# Allegro board NightIoT_uBus_Sensor_BMP_MPU_V100_PCB.brd
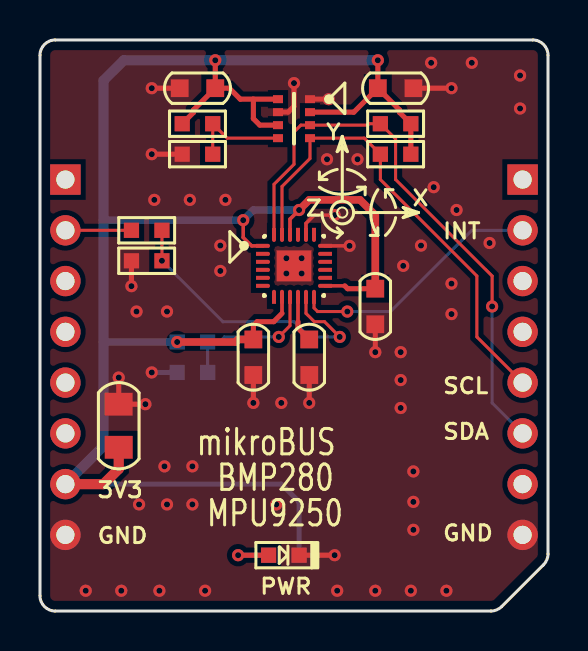
[diagram p0: board, top side]
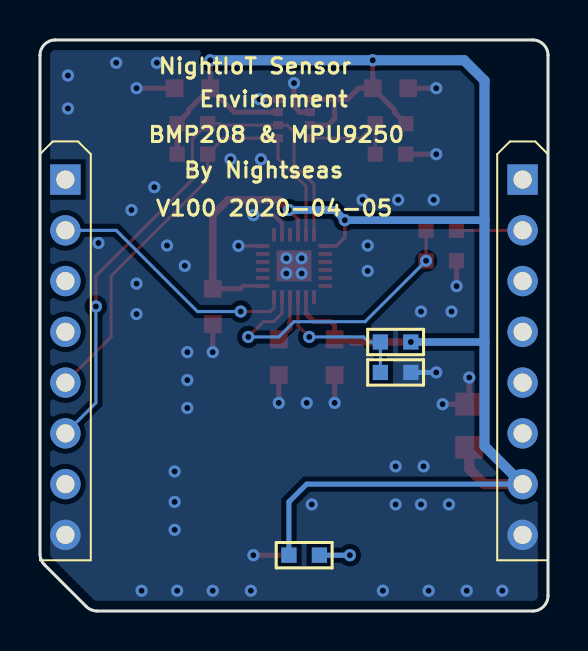
[diagram p1: board, bottom side, seen from below]

Outline 25.4 x 28.57 mm; copper layers: TOP, BOTTOM. Coordinates in mm from the lower left corner of the outline.
Outline path: 0,27.81 0,0.76 arc(0.22,0.22) 0.76,0 22.54,0 arc(22.84,0.06) 23.08,0.22 25.18,2.32 arc(25.34,2.56) 25.4,2.86 25.4,27.81 arc(25.18,28.35) 24.64,28.57 0.76,28.57 arc(0.22,28.35) 0,27.81

## Placement (name value [footprint] x y rotation side)
C1  0.1uF  [C0603]  17.78 26.16 90 top
C2  0.1uF  [C0603]  7.87 26.16 270 top
C3  10nF  [C0603]  10.67 12.7 0 top
C4  10uF  [C0805]  3.94 9.27 180 top
C5  0.1uF  [C0603]  16.76 15.24 0 top
C6  0.1uF  [C0603]  13.46 12.7 0 top
J1  uBUS_CON_A  [SIP8]  1.27 21.59 180 bottom
J2  uBUS_CON_B  [SIP8]  24.13 21.59 180 bottom
LD1  GRN  [LED0603]  11.43 2.79 0 top
R1  4.7K NC  [R0603]  7.11 24.38 0 top
R2  4.7K  [R0603]  7.11 22.86 0 top
R3  4.7K NC  [R0603]  8.38 13.46 180 bottom
R4  4.7K  [R0603]  8.38 11.94 180 bottom
R5  100K  [R0603]  6.1 17.53 180 top
R6  4.7K  [R0603]  18.54 22.86 180 top
R7  0R NC  [R0603]  6.1 19.05 180 top
R8  4.7K  [R0603]  18.54 24.38 180 top
R9  560R  [R0603]  12.95 2.79 180 bottom
U1  BMP280  [LGA8]  12.7 24.64 0 top
U2  MPU9250  [QFN24_3X3]  12.7 17.27 0 top

## Library data of the parts
C1-C6 = CAP_CE_0603
J1 J2 = HEADER 8: User Part Number: ***
LD1 = LED_0805
R1-R8 = R
R9 = R: signal model: DEFAULT_RESISTOR_4700OHM_2_1
U1 = BMP280
U2 = MPU9250

## Footprints (pads in the part's own frame, mm; a bottom-side part is the same pattern mirrored in y, then rotated)
C0603
  rect 0.889x0.889 smd: 1(0,0.889) 2(0,-0.889)
C0805
  rect 1.397x1.143 smd: 1(0,1.079) 2(0,-1.079)
LED0603
  rect 0.762x0.762 smd: 1(0,0) 2(1.524,0)
LGA8
  rect 0.5x0.4 smd: 1(0.8,0.975) 2(0.8,0.325) 3(0.8,-0.325) 4(0.8,-0.975) 5(-0.8,-0.975) 6(-0.8,-0.325) 7(-0.8,0.325) 8(-0.8,0.975)
QFN24_3X3
  custom 0.7x0.2 smd: 1(-1.55,1) 2(-1.55,0.6) 3(-1.55,0.2) 4(-1.55,-0.2) 5(-1.55,-0.6) 6(-1.55,-1) 13(1.55,-1) 14(1.55,-0.6) 15(1.55,-0.2) 16(1.55,0.2) 17(1.55,0.6) 18(1.55,1)
  custom 0.2x0.7 smd: 7(-1,-1.55) 8(-0.6,-1.55) 9(-0.2,-1.55) 10(0.2,-1.55) 11(0.6,-1.55) 12(1,-1.55) 19(1,1.55) 20(0.6,1.55) 21(0.2,1.55) 22(-0.2,1.55) 23(-0.6,1.55) 24(-1,1.55)
  rect 1.75x1.55 smd: 25(0,0)
R0603
  rect 0.762x0.762 smd: 1(0,0) 2(1.524,0)
SIP8
  rect 1.52x1.52 hole 0.91: 1(0,0)
  round 1.52 hole 0.91: 2(0,-2.54) 3(0,-5.08) 4(0,-7.62) 5(0,-10.16) 6(0,-12.7) 7(0,-15.24) 8(0,-17.78)

## Nets
GND: C1.2 C2.2 C3.2 C4.2 C5.2 C6.2 J1.8 J2.8 LD1.2(CATHODE) R2.1 R4.2 R5.2 U1.1(GND#1) U1.7(GND#7) U2.18(GND) U2.20(RESV2) U2.25(GND_EP)
VDD3V3: C1.1 C2.1 C3.1 C4.1 C5.1 J1.7 R1.1 R3.2 R6.1 R8.1 R9.1 U1.2(C\S\) U1.6(VDDIO) U1.8(VDD) U2.1(RESV0) U2.8(VDDIO) U2.13(VDD) U2.22(C\S\)
BMP_ADDR: R1.2 R2.2 U1.5(MISO)
I2C_SCL: J2.5 R6.2 U1.4(SCLK/SCL) U2.23(SCL/SCLK)
I2C_SDA: J2.6 R8.2 U1.3(MOSI/SDA) U2.24(SDA/SDI)
MPU_ADDR: R3.1 R4.1 U2.9(AD0/SDO)
MPU_FSYNC: R5.1 R7.1 U2.11(FSYNC)
MPU_INT: J2.2 U2.12(INT)
MPU_REGOUT: C6.1 U2.10(REGOUT)
MPU_RST#: J1.2 R7.2
N1536681: LD1.1(ANODE) R9.2

Pads without a net: J1 1 3 4 5 6; J2 1 3 4 7; U2 2 3 4 5 6 7 14 15 16 17 19 21

## Via types
v1: diameter 0.61, hole 0.305, TOP to BOTTOM, 71 vias

## Routing (per net, layer and track width the routed paths; a pad name or vN(x,y) marks a point on that pad's centre or on a via; arc(x,y) is an arc through that point)
GND: length 22.4
  TOP w0.178: v1(14.73,19.81) 13.72,19.81 13.3,19.4 U2.20 ; U2.18 v1(15.48,18.27)
  TOP w0.254: U1.1 v1(14.44,25.61) ; R5.2 v1(4.57,16.26) ; C6.2 v1(13.46,10.41) ; C3.2 v1(10.67,10.41) ; C5.2 v1(16.76,12.95) ; v1(5.27,10.35) C4.2 v1(3.94,11.68) ; C1.2 v1(20.57,26.16) ; LD1.2 v1(14.73,2.79) ; C2.2 v1(5.59,26.16) ; v1(12.7,26.42) 12.7,25.26 12.41,24.96 U1.7 ; R2.1 v1(5.59,22.86)
  BOTTOM w0.254: R4.2 v1(5.59,11.94)
  vias: v1(2.29,1.02) v1(4.06,1.02) v1(4.83,14.99) v1(4.95,5.33) v1(5.71,20.57) v1(5.97,1.02) v1(6.22,7.24) v1(6.35,14.99) v1(6.35,5.33) v1(7.49,20.57) v1(7.62,7.24) v1(7.62,5.33) v1(8.26,1.02) v1(9.02,18.29) v1(9.02,17.02) v1(9.27,20.57) v1(11.81,5.33) v1(12.06,10.41) v1(12.32,17.65) v1(12.32,16.89) v1(13.08,17.65) v1(13.08,16.89) v1(14.35,22.61) v1(14.86,1.02) v1(15.88,22.61) v1(16.76,1.02) v1(18.03,12.95) v1(18.03,11.56) v1(18.03,10.16) v1(18.16,17.27) v1(18.54,1.02) v1(18.67,6.99) v1(18.67,5.46) v1(18.67,4.06) v1(19.05,18.29) v1(19.56,27.43) v1(19.68,21.21) v1(20.32,1.02) v1(20.57,16.38) v1(20.57,14.86) v1(20.83,20.07) v1(21.59,27.43) v1(22.48,18.41) v1(24,26.8) v1(24,25.15)
VDD3V3: length 107.5
  TOP w0.178: v1(12.95,20.07) 12.5,19.61 U2.22 ; v1(10.16,19.56) 10.16,18.69 10.58,18.27 U2.1 ; 15.24,16.27 U2.13 ; U2.8 12.1,14.89
  TOP w0.254: 12.1,14.89 11.68,14.48 10.86,14.48 10.67,14.29 C3.1 ; 15.24,16.27 15.38,16.13 C5.1 ; C2.1 7.67,25.07 7.67,24.95 R1.1 ; C2.1 9.46,26.16 10.01,25.61 10.67,25.61 ; C2.1 v1(8.76,27.56) ; U1.8 10.67,25.61 ; 10.67,25.61 10.67,24.64 10.99,24.31 U1.6 ; U1.2 15.69,24.96 C1.1 ; C1.1 17.98,25.07 17.98,24.95 R8.1 R6.1 ; C1.1 v1(16.89,27.56)
  TOP w0.381: C5.1 16.76,19.81 16,20.57 13.46,20.57 v1(12.95,20.07) ; v1(6.86,13.46) 9.78,13.46 9.9,13.59 C3.1
  TOP w0.508: J1.7 3.17,6.35 3.94,7.11 C4.1
  BOTTOM w0.254: J1.7 12.06,6.35 12.95,5.46 R9.1
  BOTTOM w0.381: v1(6.86,13.46) 3.17,13.46 ; 3.17,19.56 v1(10.16,19.56) 10.67,20.07 v1(12.95,20.07)
  BOTTOM w0.508: J1.7 3.17,8.26 3.17,26.54 4.19,27.56 v1(8.76,27.56) v1(16.89,27.56)
BMP_ADDR: length 5.1
  TOP w0.152: R2.2 R1.2 9.36,23.66 U1.5
I2C_SCL: length 23.6
  TOP w0.152: J2.5 21.84,13.72 21.84,16.76 17.02,21.59 R6.2 16.22,23.66 U1.4 13.5,22.64 12.1,21.24 U2.23
I2C_SDA: length 28.5
  TOP w0.152: U2.24 11.7,21.35 12.7,22.35 12.7,23.97 13.04,24.31 U1.3 16.36,24.31 16.43,24.38 R8.2 17.78,23.62 17.78,21.59 22.61,16.76 v1(22.61,15.24)
  BOTTOM w0.152: v1(22.61,15.24) 22.61,10.41 J2.6
MPU_ADDR: length 7.4
  TOP w0.152: v1(11.94,13.72) 12.5,14.28 U2.9
  BOTTOM w0.152: R4.1 R3.1 8.97,13.46 9.22,13.72 v1(11.94,13.72)
MPU_FSYNC: length 15
  TOP w0.152: U2.11 13.3,14.89 13.72,14.48 14.22,14.48 v1(14.99,13.72) ; R7.1 v1(6.1,17.53)
  BOTTOM w0.152: v1(6.1,17.53) 9.14,14.48 12.7,14.48 13.46,13.72 v1(14.99,13.72)
MPU_INT: length 12.7
  TOP w0.152: v1(15.37,14.99) 13.88,14.99 13.7,15.17 U2.12
  BOTTOM w0.152: J2.2 21.59,19.05 17.53,14.99 v1(15.37,14.99)
MPU_REGOUT: length 2.4
  TOP w0.178: 12.9,14.48 U2.10
  TOP w0.254: 12.9,14.48 12.9,14.15 C6.1
MPU_RST#: length 3.3
  TOP w0.152: R7.2 J1.2
N1536681: length 3
  TOP w0.254: LD1.1 v1(9.91,2.79)
  BOTTOM w0.254: v1(9.91,2.79) LD1.1

## Copper pours and planes (outline as drawn; the poured copper is in the pictures)
GND on TOP: 0.76,0.51 0.58,0.58 0.51,0.76 0.51,27.81 0.58,27.99 0.76,28.07 24.64,28.07 24.82,27.99 24.89,27.81 24.89,2.86 24.87,2.76 24.82,2.68 22.72,0.58 22.64,0.53 22.54,0.51 ; 1 cut-out
GND on BOTTOM: 0.51,27.81 0.58,27.99 0.76,28.07 24.64,28.07 24.82,27.99 24.89,27.81 24.89,2.86 24.87,2.76 24.82,2.68 22.72,0.58 22.64,0.53 22.54,0.51 0.76,0.51 0.58,0.58 0.51,0.76 ; 1 cut-out

## Text on the board
Ref Des/Silkscreen Bottom: Environment | By Nightseas | NightIoT Sensor | V100 2020-04-05 | BMP208 & MPU9250
Ref Des/Silkscreen Top: 3V3 | GND | PWR | Z | Y | X | INT | SCL | SDA | mikroBUS | MPU9250 | BMP280
